# EAGLE board Mic to Pi Entire design (EAGLE 9.6.2)

Size 160 x 100 mm. Coordinates in mm from the lower left corner, seen from the top.
Outline: 0,0 160,0 160,100 0,100 0,0
Copper layers (1*16): Top 0.035mm / dielectric 1.5mm / Bottom 0.035mm
Design rules "default": minimum track width 6mil, minimum drill 0.35mm, track to track 6mil, track to pad 6mil, pad to pad 6mil, via to via 6mil, smd to smd 6mil, copper to edge 40mil, drill to drill 6mil, minimum pad ring 10mil, minimum via ring 8mil, stop-mask expansion 4mil, vias tented up to drill 0mil, thermal gap 10mil

## Footprints (pad centres in the part's own frame; a part is rotated, then mirrored left to right if it is on the bottom)
YC7B5 = drill 1.118 octagon: 1 -3.81,0; 2 3.81,0
DO41-10 = drill 1.118: A 5.08,0; C -5.08,0
0204/7 = drill 0.813 octagon: 1 -3.81,0; 2 3.81,0
0207/2V = drill 0.813 octagon: 1 -1.27,0; 2 1.27,0
MA17-2 = drill 1.016 octagon: 1 -20.32,-1.27; 2 -20.32,1.27; 3 -17.78,-1.27; 4 -17.78,1.27; 5 -15.24,-1.27; 6 -15.24,1.27; 7 -12.7,-1.27; 8 -12.7,1.27; 9 -10.16,-1.27; 10 -10.16,1.27; 11 -7.62,-1.27; 12 -7.62,1.27; 13 -5.08,-1.27; 14 -5.08,1.27; 15 -2.54,-1.27; 16 -2.54,1.27; 17 0,-1.27; 18 0,1.27; 19 2.54,-1.27; 20 2.54,1.27; 21 5.08,-1.27; 22 5.08,1.27; 23 7.62,-1.27; 24 7.62,1.27; 25 10.16,-1.27; 26 10.16,1.27; 27 12.7,-1.27; 28 12.7,1.27; 29 15.24,-1.27; 30 15.24,1.27; 31 17.78,-1.27; 32 17.78,1.27; 33 20.32,-1.27; 34 20.32,1.27
MA03-1 = drill 1.016 long: 1 -2.54,0; 2 0,0; 3 2.54,0
PDIP14_646-06_ONS = drill 0.813 pad 1.321 square: 1 0,0 | drill 0.813 pad 1.321: 2 0,-2.54; 3 0,-5.08; 4 0,-7.62; 5 0,-10.16; 6 0,-12.7; 7 0,-15.24; 8 7.62,-15.24; 9 7.62,-12.7; 10 7.62,-10.16; 11 7.62,-7.62; 12 7.62,-5.08; 13 7.62,-2.54; 14 7.62,0
DIP794W45P254L1969H508Q14 = drill 0.77 pad 1.17 square: 1 -3.97,7.62 | drill 0.77 pad 1.17: 2 -3.97,5.08; 3 -3.97,2.54; 4 -3.97,0; 5 -3.97,-2.54; 6 -3.97,-5.08; 7 -3.97,-7.62; 8 3.97,-7.62; 9 3.97,-5.08; 10 3.97,-2.54; 11 3.97,0; 12 3.97,2.54; 13 3.97,5.08; 14 3.97,7.62
DIP794W45P254L1969H508Q16 = drill 0.78 pad 1.13 square: 1 -3.97,8.89 | drill 0.78 pad 1.13: 2 -3.97,6.35; 3 -3.97,3.81; 4 -3.97,1.27; 5 -3.97,-1.27; 6 -3.97,-3.81; 7 -3.97,-6.35; 8 -3.97,-8.89; 9 3.97,-8.89; 10 3.97,-6.35; 11 3.97,-3.81; 12 3.97,-1.27; 13 3.97,1.27; 14 3.97,3.81; 15 3.97,6.35; 16 3.97,8.89
RASPBERRY-PI_REV1 = drill 1 square: 1 -41.91,21.59 | drill 1 pad 1.676: 2 -41.91,24.13; 6 -36.83,24.13 | drill 1: 3 -39.37,21.59; 4 -39.37,24.13; 5 -36.83,21.59; 7 -34.29,21.59; 8 -34.29,24.13; 9 -31.75,21.59; 10 -31.75,24.13; 11 -29.21,21.59; 12 -29.21,24.13; 13 -26.67,21.59; 14 -26.67,24.13; 15 -24.13,21.59; 16 -24.13,24.13; 17 -21.59,21.59; 18 -21.59,24.13; 19 -19.05,21.59; 20 -19.05,24.13; 21 -16.51,21.59; 22 -16.51,24.13; 23 -13.97,21.59; 24 -13.97,24.13; 25 -11.43,21.59; 26 -11.43,24.13

## Placement (x,y rotation side)
CY1  1 uF  [YC7B5]  -95.25,68.58 0 top  (outside the outline)
CY2  1 uF  [YC7B5]  -109.22,68.58 0 top  (outside the outline)
CY3  10 uF  [YC7B5]  -20.32,101.6 0 top  (outside the outline)
CY4  1 uF  [YC7B5]  -33.02,101.6 0 top  (outside the outline)
CY5  1 nF  [YC7B5]  -46.99,101.6 0 top  (outside the outline)
CY6  1 uF  [YC7B5]  -62.23,101.6 0 top  (outside the outline)
CY7  1 nF  [YC7B5]  -76.2,101.6 0 top  (outside the outline)
D1  1N4004  [DO41-10]  -88.9,100.33 0 top  (outside the outline)
R1  800  [0204/7]  -24.13,107.95 0 top  (outside the outline)
R2  69  [0204/7]  -34.29,107.95 0 top  (outside the outline)
R3  1600  [0204/7]  -44.45,107.95 0 top  (outside the outline)
R4  1600  [0204/7]  -54.61,107.95 0 top  (outside the outline)
R5  1.5k  [0204/7]  -64.77,107.95 0 top  (outside the outline)
R6  15k  [0204/7]  -74.93,107.95 0 top  (outside the outline)
R7  50  [0204/7]  -85.09,107.95 0 top  (outside the outline)
R8  1k  [0204/7]  -95.25,107.95 0 top  (outside the outline)
R9  1k  [0207/2V]  -16.51,109.22 0 top  (outside the outline)
R10  1k  [0207/2V]  -99.06,100.33 0 top  (outside the outline)
R11  1k  [0207/2V]  -111.76,100.33 0 top  (outside the outline)
R12  1k  [0207/2V]  -105.41,100.33 0 top  (outside the outline)
R13  800  [0204/7]  -105.41,107.95 0 top  (outside the outline)
R14  800k  [0204/7]  -17.78,114.3 0 top  (outside the outline)
R15  8  [0204/7]  -27.94,114.3 0 top  (outside the outline)
R16  800  [0204/7]  -38.1,114.3 0 top  (outside the outline)
R17  400  [0204/7]  -48.26,114.3 0 top  (outside the outline)
R18  400k  [0204/7]  -58.42,114.3 0 top  (outside the outline)
R19  1k  [0204/7]  -68.58,114.3 0 top  (outside the outline)
R20  1k  [0204/7]  -78.74,114.3 0 top  (outside the outline)
R21  800k  [0204/7]  -88.9,114.3 0 top  (outside the outline)
R22  500  [0204/7]  -99.06,114.3 0 top  (outside the outline)
SV1  [MA17-2]  -99.06,-5.08 0 top  (outside the outline)
SV2  [MA03-1]  -115.57,-13.97 0 top  (outside the outline)
U1  LM339AN  [PDIP14_646-06_ONS]  -31.75,92.71 0 top  (outside the outline)
U2  TL084CN  [DIP794W45P254L1969H508Q14]  -49.53,76.2 0 top  (outside the outline)
U3  SN74LS153N  [DIP794W45P254L1969H508Q16]  -127,-2.54 0 top  (outside the outline)
U$1  RASPBERRY-PI_REV1  [RASPBERRY-PI_REV1]  -62.23,30.48 0 top  (outside the outline)

## Library data of the parts
CY1-CY7 = rcl; SPICEPREFIX: C
D1 = diode
R1-R22 = rcl; SPICEPREFIX: R
SV1 SV2 = con-lstb; OC_FARNELL: unknown; OC_NEWARK: unknown
U1 = LM339AN; COPYRIGHT: Copyright (C) 2022 Ultra Librarian. All rights reserved.; DIGI-KEY_PART_NUMBER_1: 2156-LM339AN-HC-ND; DIGI-KEY_PART_NUMBER_2: 2156-LM339AN-ON-ND; DIGI-KEY_PART_NUMBER_3: 296-6605-5-ND; DIGI-KEY_PART_NUMBER_4: 497-1587-5-ND; DIGI-KEY_PART_NUMBER_5: LM339ANFS-ND; MANUFACTURER_PART_NUMBER: LM339AN; MFR_NAME: onsemi
U2 = TL084CN; DESCRIPTION: Quad High Slew Rate JFET-Input Operational Amplifier 14-PDIP 0 to 70; DIGI-KEY_PART_NUMBER: 296-1784-5-ND; MF: Texas Instruments; MP: TL084CN; PACKAGE: PDIP-14 Texas Instruments; PURCHASE-URL: https://pricing.snapeda.com/search/part/TL084CN/?ref=eda
U3 = SN74LS153N; AVAILABILITY: In Stock; DESCRIPTION: Dual 4-Line To 1-Line Data Selectors/Multiplexers 16-PDIP 0 to 70; MF: Texas Instruments; MP: SN74LS153N; PACKAGE: PDIP-16 Texas Instruments; PRICE: None; PURCHASE-URL: https://pricing.snapeda.com/search/part/SN74LS153N/?ref=eda
U$1 = RaspberryPi

## Nets
+3V3: R8.2 R12.2 R19.2 R20.2 U3.16 U$1.1
+5V: SV2.3 U1.3 U$1.4
GND: CY3.2 R2.1 R4.1 R7.1 R11.1 R13.1 R14.1 R15.1 R22.1 SV2.2 U1.12 U2.12 U3.6 U3.8 U$1.9 U$1.14 U$1.20 U$1.25
N$1: R5.1 U3.7
N$2: R13.2 U2.5
N$3: R14.2 U2.10
N$4: R1.1 R17.1 R18.1 SV2.1
N$5: CY4.1 CY6.1 R15.2 R17.2
N$6: CY5.1 CY7.1 R18.2 R22.2
N$7: CY4.2 R16.1 U2.6
N$8: CY2.2 R3.2 U2.1 U3.5
N$9: CY5.2 R21.1 U2.9
N$10: CY6.2 R16.2 U2.7 U3.4
N$11: CY1.1 CY2.1 R1.2 R2.2
N$12: CY1.2 R3.1 U2.2
N$13: R4.2 U2.3
N$14: CY7.2 R21.2 U2.8 U3.3
N$15: CY3.1 D1.C R7.2 U1.5 U1.7 U1.9
N$16: R19.1 U1.1 U$1.24
N$17: R8.1 R9.2 U1.4
N$18: R9.1 R10.2 U1.6
N$19: R10.1 R11.2 U1.8
N$20: R20.1 U1.2 U$1.22
N$21: R12.1 U1.14 U$1.26
N$24: R5.2 R6.1 U2.13
N$25: D1.A R6.2 U2.14
N$26: U3.2 U$1.21
N$27: U3.14 U$1.23
VCC/2: U2.4 U2.11

## Tracks (layer width: path | path; a pad name or v marks a point on that pad's centre or on a via)
+3V3  (5 unrouted)
+5V  (2 unrouted)
GND  (17 unrouted)
N$1  (1 unrouted)
N$2  (1 unrouted)
N$3  (1 unrouted)
N$4  (3 unrouted)
N$5  (3 unrouted)
N$6  (3 unrouted)
N$7  (2 unrouted)
N$8  (3 unrouted)
N$9  (2 unrouted)
N$10  (3 unrouted)
N$11  (3 unrouted)
N$12  (2 unrouted)
N$13  (1 unrouted)
N$14  (3 unrouted)
N$15  (5 unrouted)
N$16  (2 unrouted)
N$17  (2 unrouted)
N$18  (2 unrouted)
N$19  (2 unrouted)
N$20  (2 unrouted)
N$21  (2 unrouted)
N$24  (2 unrouted)
N$25  (2 unrouted)
N$26  (1 unrouted)
N$27  (1 unrouted)
VCC/2  (1 unrouted)